# Altium PCB PCB1.PcbDoc
Units mm, origin at the board's own origin, x right, y up, seen from the top; angles counter-clockwise.
Board outline 152.4 x 101.6 mm, 2 copper layers (Top Layer, Bottom Layer), stack 1.571 mm thick; 45 components, 24 nets, 164 pads, 6 vias.
Unrouted connection lines stored in the file: 43.
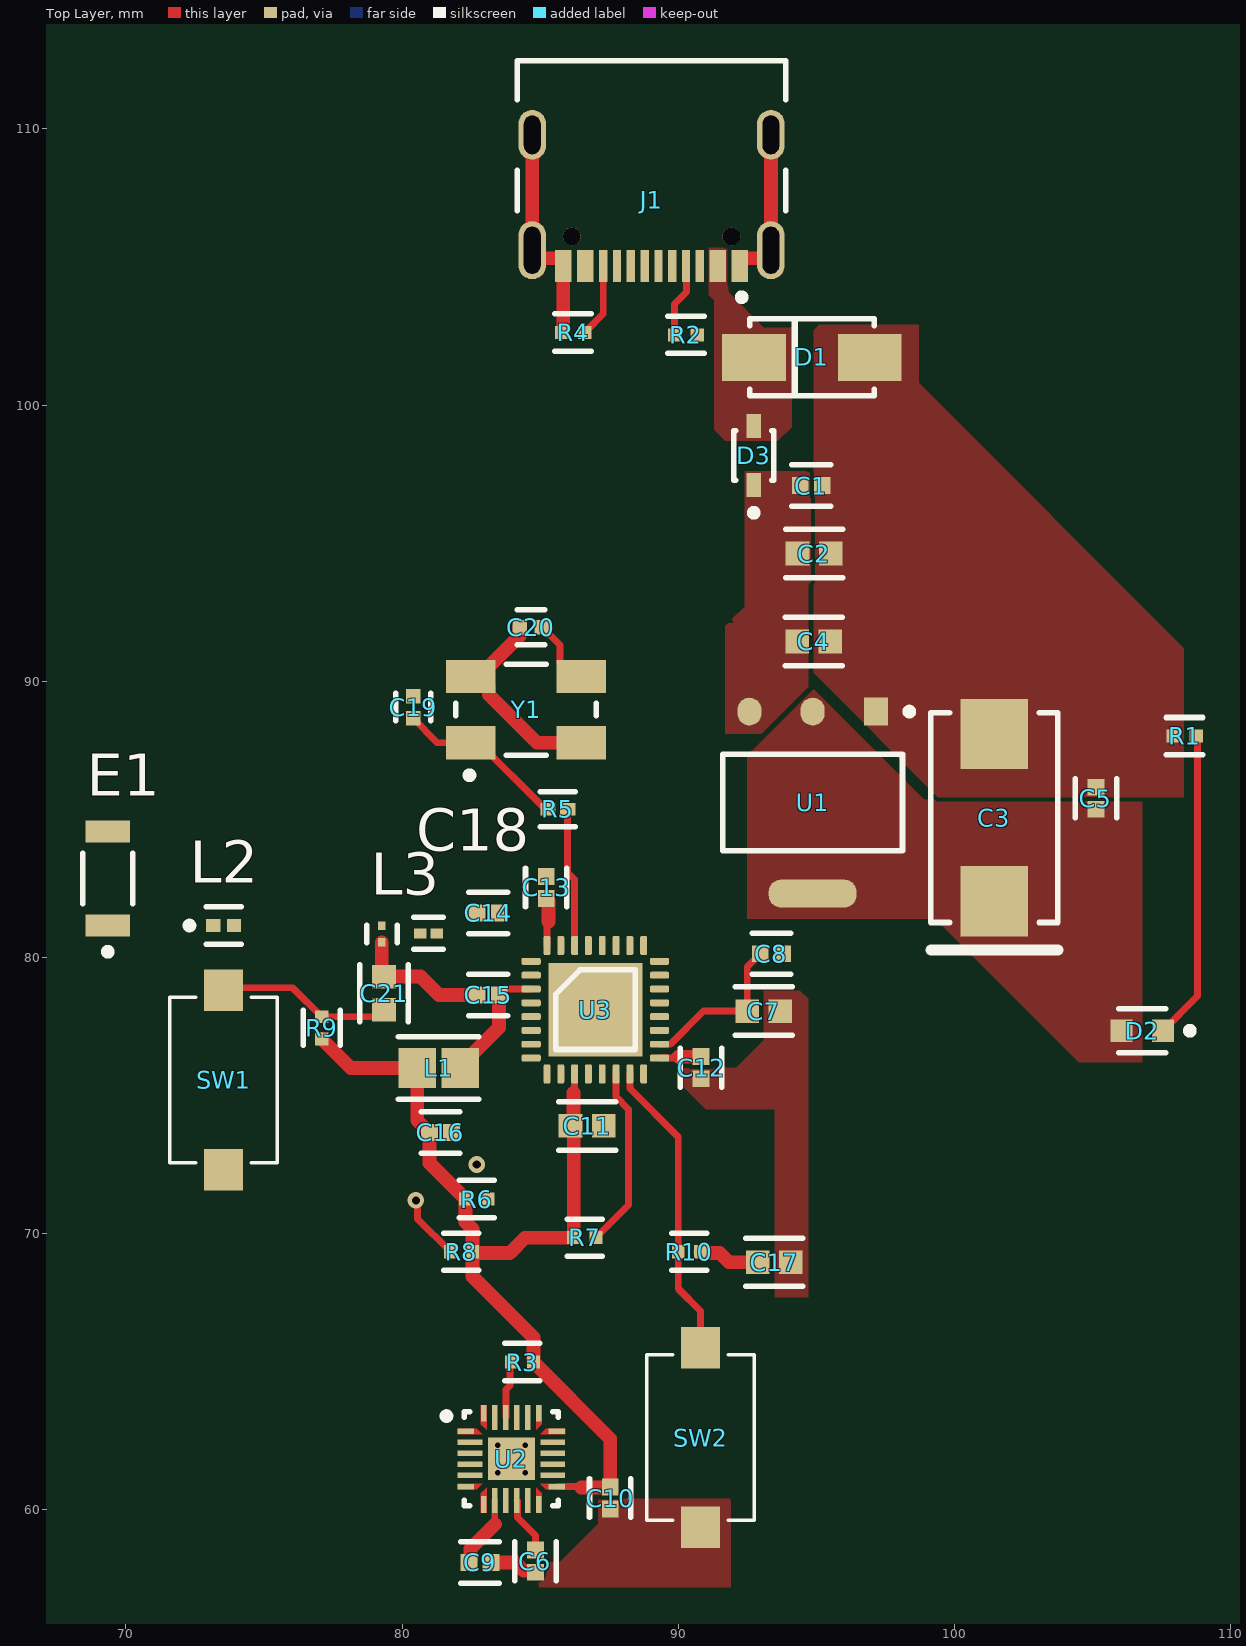
[diagram p0: Top Layer view]
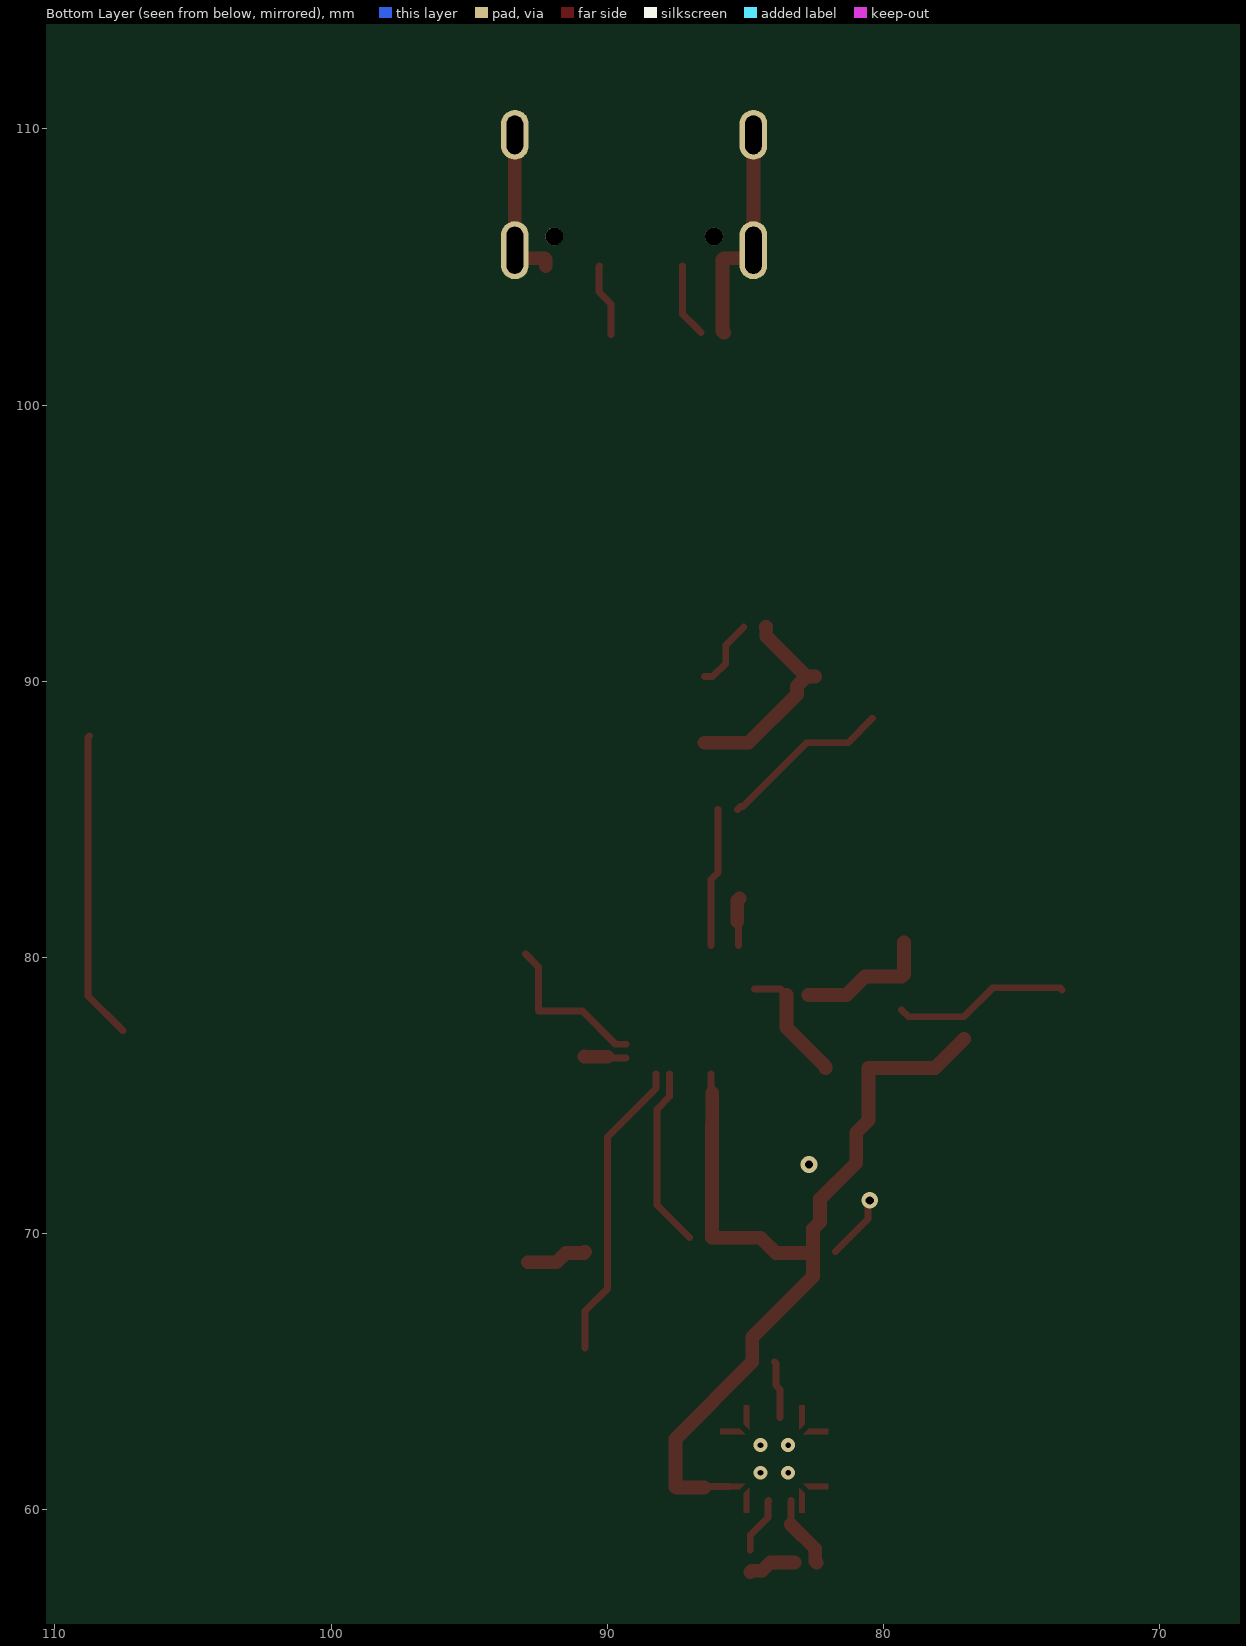
[diagram p1: Bottom Layer view, seen from below]

## Layer stack, top to bottom
Top Solder: solder mask 0.0102, Solder Resist, Dk 3.5
Top Layer: signal copper 0.0356
Dielectric 1: core 1.5, Core-025, Dk 4.6
Bottom Layer: signal copper 0.0356
Bottom Solder: solder mask 0.0102, Solder Resist, Dk 3.5

## Board outline
25.4,25.4 177.8,25.4 177.8,127 25.4,127

## Design rules (kind name [scope] priority, off if disabled: settings)
Clearance [All] p1: gap=0.152 ignorepadtopadclearanceinfootprint=FALSE
DiffPairsRouting [All] p1: maxlimit=0.254 minlimit=0.254 mostfreqgap=0.254 toplayer_minwidth=0.381 toplayer_maxwidth=0.381 toplayer_prefwidth=0.381 bottomlayer_minwidth=0.381 bottomlayer_maxwidth=0.381 bottomlayer_prefwidth=0.381 maxuncoupledlength=12.7
PolygonConnect [All] p1: connectstyle=Direct reliefconductorwidth=0.254 reliefentries=4 polygonreliefangle="90 Angle" airgapwidth=0.254
RoutingVias [All] p1: holewidth=0.3 width=0.6 viastyle="Through Hole" minholewidth=0.61 minwidth=1.27 maxholewidth=0.711 maxwidth=1.27
SilkToSolderMaskClearance [IsPad] p1: minsilkscreentomaskgap=0.102 clearancetoexposedcopper=TRUE
SolderMaskExpansion [All] p1: expansion=0.102 istentingtop=FALSE
SupplyNets "Schematic Supply Nets_4" [InNet('VBUS')] p1: voltage=0.000
SupplyNets "Schematic Supply Nets_3" [InNet('VSUS')] p2: voltage=0.000
SupplyNets "Schematic Supply Nets_2" [InNet('+3.3 RF')] p3: voltage=0.000
SupplyNets "Schematic Supply Nets_1" [InNet('+3.3V')] p4: voltage=0.000
SupplyNets "Schematic Supply Nets" [InNet('GND')] p5: voltage=0.000
Width [All] p1: maxlimit=0.762 minlimit=0.152 preferedwidth=0.254 minimp=50.000000 maximp=50.000000 favimp=50.000000
28 further rules are at their usual default settings.

## Classes and differential pairs
differential pair DIFF_P: +DIFF_P_P -DIFF_P_N

## Components (designator, comment, footprint, x,y, rotation, side; value= is the part's Value field where it differs from the comment)
C1 "100n" FP-0402B104K500CT-IPC_C 94.814,97.084 r180 top
C2 "10u" FP-GRM188-0_15-IPC_C 94.918,94.621 r180 top
C3 "22u" VISH-7343-31_N 101.444,85.063 r90 top
C4 "10u" FP-GRM188-0_15-IPC_C 94.903,91.44 r0 top
C5 "100n" FP-0402B104K500CT-IPC_C 105.123,85.765 r90 top
C6 "100n" FP-0402B104K500CT-IPC_C 84.828,58.14 r270 top
C7 "10u" FP-GRM188-0_15-IPC_C 93.095,78.053 r0 top
C8 "100n" FP-0402B104K500CT-IPC_C 93.372,80.132 r0 top
C9 "100n" FP-0402B104K500CT-IPC_C 82.821,58.09 r0 top
C10 "100n" FP-0402B104K500CT-IPC_C 87.534,60.425 r270 top
C11 "10u" FP-GRM188-0_15-IPC_C 86.699,73.9 r0 top
C12 "100n" FP-0402B104K500CT-IPC_C 90.825,76.008 r270 top
C13 "100n" FP-0402B104K500CT-IPC_C 85.217,82.531 r90 top
C14 "100n" FP-0402B104K500CT-IPC_C 83.112,81.607 r180 top
C15 "100n" FP-0402B104K500CT-IPC_C 83.112,78.638 r180 top
C16 "100n" FP-0402B104K500CT-IPC_C 81.388,73.66 r0 top
C17 "10u" FP-GRM188-0_15-IPC_C 93.472,68.961 r0 top
C18 "1p" FP-GRT033-0_03-IPC_B 80.957,80.868 r180 top
C19 "10p" FP-C0402-BB-MFG 80.398,89.06 r90 top value="10 pF"
C20 "10p" FP-C0402-BB-MFG 84.66,91.959 r180 top value="10 pF"
C21 "10u" FP-GRM188-0_15-IPC_C 79.346,78.703 r90 top
D1 "TVS diode" WE-TVSP_DO-214AC_Unidirectional 94.84,101.727 r0 top
D2 "LG Q396-PS-35" FP-LG_Q396-MFG 106.795,77.343 r180 top
D3 "3A" FP-BAT60JFILM-MFG 92.732,98.173 r90 top
E1 "2450AT18A100E" JT-2450AT18A100-2_V 69.342,82.853 r90 top
J1 "USB4105-GF-A" FP-USB4105-GF-A-MFG 89.031,108.619 r180 top
L1 "2.2u" FP-MLZ2012-0_85-IPC_B 81.321,75.992 r180 top
L2 "3n9" FP-LQG15HH_02-IPC_C 73.535,81.153 r0 top
L3 "2n7" FP-LQP03HQ_02-MFG 79.265,80.847 r90 top
R1 "5k1" FP-RN73R1E-IPC_C 108.331,88.011 r0 top
R2 "5k1" FP-RN73R1E-IPC_C 90.278,102.543 r0 top
R3 "10k" FP-MCS0402-IPC_C 84.354,65.345 r0 top
R4 "5k1" FP-RN73R1E-IPC_C 86.192,102.625 r180 top
R5 "22R" FP-AF0201-IPC_A 85.638,85.36 r180 top
R6 "10k" FP-MCS0402-IPC_C 82.7,71.247 r180 top
R7 "10k" FP-MCS0402-IPC_C 86.614,69.85 r180 top
R8 "10k" FP-MCS0402-IPC_C 82.146,69.342 r0 top
R9 "10k" FP-MCS0402-IPC_C 77.089,77.447 r270 top
R10 "10k" FP-MCS0402-IPC_C 90.401,69.342 r0 top
SW1 "434121025816" 434121025816 73.533,75.565 r270 top
SW2 "434121025816" 434121025816 90.805,62.611 r270 top
U1 "AMS1117-3.3" FP-AMS1117-IPC_C 94.865,85.605 r270 top
U2 "MPU-6500" INSE-MPU-6500-QFN24_M 83.955,61.841 r0 top
U3 "ESP32-C3" "ESP32-C3 - duplicate2" 86.995,78.105 r0 top
Y1 "40MHZ" FP-ABM3B-MFG 84.487,88.97 r0 top

## Footprints (in the part's own frame and the unit in brackets; to place one, negate y for a bottom-side part, rotate by r counter-clockwise, add the part's x,y. Pads: shape width x height; smd on the part's side, far side on the other; paste and mask are expansions set on the pad)
434121025816 [mm] "SMD Tact Switch, body 6x3.8mm"
  rect 1.5x1.4 smd: 1(-3.25,0) 2(3.25,0)
  silkscreen extent -3,-1.95 3,1.95, body extent -3.65,-1.95 3.65,1.95, height 2.5
"ESP32-C3 - duplicate2" [mm]
  rrect50% 0.7x0.25 smd paste-0.051 mask+0.051: 1(-2.325,1.75) 2(-2.325,1.25) 3(-2.325,0.75) 4(-2.325,0.25) 5(-2.325,-0.25) 6(-2.325,-0.75) 7(-2.325,-1.25) 8(-2.325,-1.75) 17(2.325,-1.75) 18(2.325,-1.25) 19(2.325,-0.75) 20(2.325,-0.25) 21(2.325,0.25) 22(2.325,0.75) 23(2.325,1.25) 24(2.325,1.75)
  rrect50% 0.25x0.7 smd paste-0.051 mask+0.051: 9(-1.75,-2.325) 10(-1.25,-2.325) 11(-0.75,-2.325) 12(-0.25,-2.325) 13(0.25,-2.325) 14(0.75,-2.325) 15(1.25,-2.325) 16(1.75,-2.325) 25(1.75,2.325) 26(1.25,2.325) 27(0.75,2.325) 28(0.25,2.325) 29(-0.25,2.325) 30(-0.75,2.325) 31(-1.25,2.325) 32(-1.75,2.325)
  rect 3.4x3.4 smd mask+0: 33(0,0)
  silkscreen extent -1.44,-1.44 1.44,1.44, body extent -2.5,-2.5 2.5,2.5, height 1.12
FP-0402B104K500CT-IPC_C [mm]
  rect 0.606x0.606 smd paste+0 mask+0: 1(-0.4,0) 2(0.4,0)
  silkscreen extent -0.7,-0.75 0.7,0.75, body extent -0.8,-0.45 0.8,0.45, height 0.25
FP-ABM3B-MFG [mm]
  rect 1.8x1.2 smd paste+0 mask+0: 1(-2,-1.2) 2(2,-1.2) 3(2,1.2) 4(-2,1.2)
  silkscreen extent -2.55,-2.5 2.55,1.65, body extent -3,-1.9 3,1.9, height 0.25
FP-AF0201-IPC_A [mm]
  rect 0.554x0.463 smd paste+0 mask+0: 1(-0.354,0) 2(0.354,0)
  silkscreen extent -0.63,-0.63 0.63,0.63, body extent -0.83,-0.43 0.83,0.43, height 0.25
FP-AMS1117-IPC_C [mm]
  rect 1.004x0.872 smd paste+0 mask+0: 1(-3.295,2.29)
  rrect100% 1.004x0.872 smd paste+0 mask+0: 2(-3.295,0) 3(-3.295,-2.29)
  rrect87% 1.004x3.182 smd paste+0 mask+0: 4(3.295,0)
  silkscreen extent -3.42,-3.25 1.75,3.63, body extent -3.9,-3.35 3.9,3.35, height 0.25
FP-BAT60JFILM-MFG [mm]
  rect 0.86x0.54 smd paste+0 mask+0: 1(-1.07,0) 2(1.07,0)
  silkscreen extent -2.2,-0.72 0.9,0.72, body extent -1.6,-0.82 1.6,0.82, height 0.25
FP-C0402-BB-MFG [mm]
  rect 0.52x0.52 smd paste+0 mask+0: 1(-0.4,0) 2(0.4,0)
  silkscreen extent -0.5,-0.64 0.5,0.64, body extent -0.8,-0.4 0.8,0.4, height 0.25
FP-GRM188-0_15-IPC_C [mm]
  rect 0.856x0.858 smd paste+0 mask+0: 1(-0.601,0) 2(0.601,0)
  silkscreen extent -1.03,-0.87 1.03,0.87
FP-GRT033-0_03-IPC_B [mm]
  rect 0.454x0.363 smd paste+0 mask+0: 1(-0.304,0) 2(0.304,0)
  silkscreen extent -0.53,-0.58 0.53,0.58, body extent -0.68,-0.33 0.68,0.33, height 0.25
FP-LG_Q396-MFG [mm]
  rect 0.8x0.8 smd paste+0 mask+0: 1(-0.75,0) 2(0.75,0)
  silkscreen extent -1.85,-0.8 0.85,0.8, body extent -1.25,-0.55 1.25,0.55, height 0.25
FP-LQG15HH_02-IPC_C [mm]
  rect 0.515x0.472 smd paste+0 mask+0: 1(-0.379,0) 2(0.379,0)
  silkscreen extent -1.36,-0.67 0.64,0.67, body extent -0.74,-0.38 0.74,0.38, height 0.25
FP-LQP03HQ_02-MFG [mm]
  rect 0.3x0.275 smd paste+0 mask+0: 1(-0.3,0) 2(0.3,0)
  silkscreen extent -0.32,-0.56 0.32,0.55, body extent -0.55,-0.27 0.55,0.26, height 0.25
FP-MCS0402-IPC_C [mm]
  rect 0.465x0.472 smd paste+0 mask+0: 1(-0.404,0) 2(0.404,0)
  silkscreen extent -0.64,-0.67 0.64,0.67, body extent -0.74,-0.38 0.74,0.38, height 0.25
FP-MLZ2012-0_85-IPC_B [mm]
  rect 1.354x1.456 smd paste+0 mask+0: 1(-0.776,0) 2(0.776,0)
  silkscreen extent -1.45,-1.13 1.45,1.13, body extent -1.7,-0.98 1.7,0.98, height 0.25
FP-RN73R1E-IPC_C [mm]
  rect 0.488x0.472 smd paste+0 mask+0: 1(-0.414,0) 2(0.414,0)
  silkscreen extent -0.66,-0.67 0.66,0.67, body extent -0.76,-0.38 0.76,0.38, height 0.25
FP-USB4105-GF-A-MFG [mm]
  rrect100% 1x2.1 hole 1.7 slot 0.6 at 0 deg paste-2539.97 mask+0: 1(-4.32,3.015) 2(4.32,3.015)
  rrect100% 1x1.8 hole 1.4 slot 0.6 at 0 deg paste-2539.97 mask+0: 3(-4.32,-1.165) 4(4.32,-1.165)
  rect 0.6x1.15 smd paste+0 mask+0: A1-B12(-3.2,3.59) A4-B9(-2.4,3.59) B1-A12(3.2,3.59) B4-A9(2.4,3.59)
  rect 0.3x1.15 smd paste+0 mask+0: A5(-1.25,3.59) A6(-0.25,3.59) A7(0.25,3.59) A8(1.25,3.59) B5(1.75,3.59) B6(0.75,3.59) B7(-0.75,3.59) B8(-1.75,3.59)
  round 0.65 hole 0.65 unplated paste-2539.97 mask+0: ""(-2.89,2.515) ""(2.89,2.515)
  silkscreen extent -4.86,-3.84 4.86,4.84, body extent -4.96,-3.94 4.96,4.27, height 0.25
INSE-MPU-6500-QFN24_M [mm] "QFN, 24-Leads, Body 3.1x3.1mm, Pitch 0.4mm, Thermal Pad 1.7X1.54mm, IPC Low Density"
  rect 0.6x0.2 smd: 1(-1.65,1) 6(-1.65,-1) 13(1.65,-1) 18(1.65,1)
  rect 0.9x0.2 smd: 2(-1.5,0.6) 3(-1.5,0.2) 4(-1.5,-0.2) 5(-1.5,-0.6) 14(1.5,-0.6) 15(1.5,-0.2) 16(1.5,0.2) 17(1.5,0.6)
  rect 0.2x0.6 smd: 7(-1,-1.65) 12(1,-1.65) 19(1,1.65) 24(-1,1.65)
  rect 0.2x0.9 smd: 8(-0.6,-1.5) 9(-0.2,-1.5) 10(0.2,-1.5) 11(0.6,-1.5) 20(0.6,1.5) 21(0.2,1.5) 22(-0.2,1.5) 23(-0.6,1.5)
  rect 1.7x1.54 smd: 25(0,0)
  Top Layer region: 1.95,-1.1 1.95,-0.9 1.05,-0.9 1.25,-1.1
  Top Layer region: 1.95,1.1 1.95,0.9 1.05,0.9 1.25,1.1
  Top Layer region: -1.1,1.95 -0.9,1.95 -0.9,1.05 -1.1,1.25
  Top Layer region: 1.1,-1.95 0.9,-1.95 0.9,-1.05 1.1,-1.25
  Top Layer region: -1.95,-1.1 -1.95,-0.9 -1.05,-0.9 -1.25,-1.1
  Top Layer region: 1.1,1.95 0.9,1.95 0.9,1.05 1.1,1.25
  Top Layer region: -1.1,-1.95 -0.9,-1.95 -0.9,-1.05 -1.1,-1.25
  Top Layer region: -1.95,1.1 -1.95,0.9 -1.05,0.9 -1.25,1.1
  silkscreen extent -2.47,-1.7 1.7,1.7, body extent -1.55,-1.55 1.55,1.55, height 0.95
JT-2450AT18A100-2_V [mm] "Chip Antenna, 2-Leads, Body 3.4x1.8mm"
  rect 0.8x1.6 smd: 1(-1.7,0) 2(1.7,0)
  silkscreen extent -2.77,-0.9 0.91,0.9, body extent -1.7,-0.9 1.7,0.9, height 1.4
VISH-7343-31_N [mm] "Molded Capacitor, 2-Leads, Body 7.6x4.6mm, IPC Medium Density"
  rect 2.55x2.45 smd: 1(-3.025,0) 2(3.025,0)
  silkscreen extent -4.8,-2.3 3.8,2.3, body extent -4.02,-2.3 4.02,2.3, height 3.1
WE-TVSP_DO-214AC_Unidirectional [mm] "Power TVS Diode, 2-Leads. body 4.24x2.67mm"
  rect 2.3x1.7 smd: 1(-2.1,0) 2(2.1,0)
  silkscreen extent -2.25,-1.4 2.25,1.4, body extent -2.56,-1.33 2.56,1.34, height 2.24

## Part data
C1 C5 C6 C8 C9 C10 C12 C13 C14 C15 C16: library part CMP-45632-000010-1, "CAP CER 0.1UF 50V X7R 0402", Capacitance=100nF, Case Code (Imperial)=0402, Case Code (Metric)=1005, Max Operating Temperature=125°C, Min Operating Temperature=-55°C, Tolerance=10%, Voltage Rating=50V, Case/Package=0402, Mount="Surface Mount", Packaging="Cut Tape", RoHS Compliant=Yes, Series=-
C2 C4 C7 C11 C17 C21: library part CMP-06035-017494-1, "Chip Multilayer Ceramic Capacitors for General Purpose, 0603, 10uF, X5R, 15%, 20%, 16V", Capacitance=10uF, Case Code (Imperial)=0603, Case Code (Metric)=1608, Max Operating Temperature=85°C, Min Operating Temperature=-55°C, Tolerance=20%, Voltage Rating=16V, Case/Package=0603, Height=0.8mm, Lead Free="Lead Free", Length=0.063inch, Material=Ceramic, Mount="Surface Mount", Packaging="Cut Tape", Thickness=0.037inch, Voltage Rating (DC)=16V, Width=0.031inch
C3: library part CMP-1666-00023-1, "Solid Tantalum Chip Capacitor, 22 uF, +/- 10%, 20 V, -55 to 125 degC, 2917 (7343 Metric), RoHS, Tape and Reel", Capacitance="47 uF", Case Code (Imperial)=1210, Case Code (Metric)=3225, Max Operating Temperature="125 degC", Min Operating Temperature="-55 degC", Package Quantity=1500, Tolerance=20%, Type (Capacitors)=X7R, Voltage Rating="6.3 V", Case\Package=1210, ComponentLink1Description="Manufacturer URL", ComponentLink1URL=http://www.vishay.com/, ComponentLink2Description=Datasheet, ComponentLink2URL=http://www.vishay.com/docs/40002/293d.pdf, DatasheetVersion=Aug-16, Height="2.5 mm", Length="3.2 mm", Mount="Surface Mount", PackageDescription="2-Pin Surface Mount Device, Body 7.3 x 4.3 mm", PackageReference=7343-31, Packaging="Tape and Reel", Pins=2, Radiation Hardening=No, REACH SVHC="No SVHC", RoHSCompliant=true, Voltage Rating (DC)="6.3 V", Width="2.5 mm"
C18: library part CMP-06035-000122-2, "Multi-Layer Ceramic Capacitor 1pF 50V C0G ±0.25pF 0201 Paper T/R"
C19 C20: library part CMP-03020-005426-2, "CAP CER 10PF 16V NP0 0402", Capacitance="10 pF", Manufacturer=Kemet, Manufacturer Part Number=C0402C100J4GAC7867, Package=C0402-BB, Temperature="-55°C to +125°C", Temperature Characteristic=C0G, Temperature Coefficient=15%, Temperature Range High=+125°C, Temperature Range Low=-55°C, Tolerance=0.05, Voltage Rating="16 V", Automotive=No, Category=Cap, ComponentLink2Description=Datasheet, ComponentLink2URL=https://content.kemet.com/datasheets/KEM_C1002_X7R_SMD.pdf, Device Class L1="Passive Components", Device Class L2=Capacitors, Device Class L3="Ceramic Capacitors", Digikey Description="CAP CER 10PF 16V NP0 0402", Height=0.55mm, Ipc Land Pattern Name=CAPC10050X50, Lead Free=Yes, Material=Ceramic, Octopart=https://octopart.com/c0402c100j4gac7867-kemet-1500972, RoHS=TRUE
D1: library part CMP-03913-71101541-2, "TVS diode [Würth Elektronik] 824500851 TVS diode", Breakdown Voltage=99.2V, Clamping Voltage=137V, Leakage Current=1µA, Max Operating Temperature=150°C, Min Operating Temperature=-65°C, Peak Pulse Current=2.9A, Peak Pulse Power=400W, Power Line Protection=No, Reverse Standoff Voltage=85V, Composition=Zener, Height=2.25mm, Length=4.24mm, Max Breakdown Voltage=99.2V, Min Breakdown Voltage=99.2V, Mount="Surface Mount", Number of Pins=2, Number of Unidirectional Channels=1, Packaging="Cut Tape", Polarity=Unidirectional, REACH SVHC=Unknown, RoHS=Compliant, Width=2.67mm
D2: library part CMP-62016-000069-1, "LED GREEN DIFFUSED 0603 SMD", Case Code (Imperial)=0603, Case Code (Metric)=1608, Color=Green, Forward Current=20mA, Forward Voltage=2V, Lens Color=White, Case/Package=0603, Dominant Wavelength=573nm, Height=0.4mm, Length=1.6mm, Lens Size=0.8mm, Lens Style=Flat, Lens Transparency=Diffused, Luminous Intensity=163mcd, Mount="Surface Mount", Packaging="Tape and Reel", REACH SVHC="No SVHC", RoHS Compliant=Yes, Test Current=20mA, Viewing Angle=120°, Wavelength=573nm, Width=0.8mm
D3: library part CMP-12187-000028-1, "DIODE SCHOTTKY 10V 3A SOD323", Forward Voltage=580mV, Max Forward Surge Current (Ifsm)=5A, Max Operating Temperature=150°C, Max Repetitive Reverse Voltage (Vrrm)=10V, Max Reverse Leakage Current=7.5uA, Min Operating Temperature=-65°C, Package Quantity=1, Average Rectified Current=3A, Contact Plating=Tin, Current Rating=3A, Element Configuration=Single, Forward Current=3A, Height=1.07mm, Lead Free="Lead Free", Length=1.8mm, Max Reverse Voltage (DC)=10V, Max Surge Current=5A, Mount="Surface Mount", Number of Pins=2, Output Current=3A, Packaging="Tape and Reel", Peak Non-Repetitive Surge Current=5A, Peak Reverse Current=7.5uA, Polarity=Standard, Radiation Hardening=No, REACH SVHC="No SVHC", Voltage Rating (DC)=10V, Weight=0.01lb, Width=1.45mm
E1: library part CMP-2000-05167-1, "Ceramic Antenna, 2.45 GHZ, 2 W, -40 to 125 degC, 2-Pin SMD, RoHS, Tape and Reel", Manufacturer="Johanson Technology", Maximum Frequency=2500MHz, Minimum Frequency=2400MHz, Package=2Case18-4, Category=Antenna, Datasheet URL=http://www.johansontechnology.com/datasheets/antennas/2450AT18A100.pdf, Datasheet Version="Rev. 1.3, 07/2014", Manufacturer URL=https://www.johansontechnology.com/, Type=Ceramic, Typical Antenna Gain=0.5dB
J1: library part CMP-245163-000001-1, "CONN RCPT USB2.0 TYPEC 5A", Current Rating=5/6.25/1.25/0.25A, Manufacturer=GCT, Package=0, Temperature="-40°C to +85°C", Temperature Range High=+85°C, Temperature Range Low=-40°C, Voltage Rating=20V, Automotive=No, Category=Conn, ComponentLink2Description=Datasheet, ComponentLink2URL=https://gct.co/files/drawings/usb4105.pdf, Conn Orientation="Right Angle", Contact Material=Gold,Nickel, Device Class L1=Connectors, Device Class L2="USB Connectors", Device Class L3=unset, Digikey Description="CONN RCPT USB2.0 TYPEC 5A", Height=3.46mm, Is Female=yes, Lead Free=Yes, Manufacturer Part Number=USB4105-GF-A, Number Of Contacts=16, Octopart=https://octopart.com/usb4105-gf-a-gct-106627878, RoHS=TRUE, Usb Standard="USB 2.0"
L1: library part CMP-08253-000223-1, "Shielded Multilayer Inductor 2.2uH ±20% 800mA 156mΩ AEC-Q200 SMD 0805", Case Code (Imperial)=0805, Case Code (Metric)=2012, Current Rating=800mA, DC Resistance (DCR)=156mR, Inductance=2.2uH, Max Operating Temperature=125°C, Min Operating Temperature=-55°C, Package Quantity=1, Ratings=AEC-Q200, Resistance=0.156R, Saturation Current=170mA, Test Frequency=2MHz, Tolerance=20%, Case/Package=0805, Core Material=Ferrite, Height=0.85mm, Height - Seated (Max)=0.041inch, Length=0.079inch, Max DC Current=800mA, Mount="Surface Mount", Packaging="Tape and Reel", RoHS Compliant=Yes, Shielding=Shielded, Termination=SMD/SMT, Weight=0.000194oz, Width=1.25mm
L2: library part CMP-06042-010120-1, "Multilayer type Inductor for Automotive 39nH ±3% 0.65Ω 300mA 0402", Case Code (Imperial)=0402, Case Code (Metric)=1005, Continuous Drain Current (ID)=24A, Current Rating=300mA, DC Resistance (DCR)=650mR, Drain to Source Voltage (Vdss)=250V, Inductance=39nH, Input Capacitance=2.41nF, Max Operating Temperature=125°C, Max Power Dissipation=150W, Min Operating Temperature=-55°C, Ratings=AEC-Q200, Self Resonant Frequency=1.2GHz, Test Frequency=100MHz, Tolerance=3%, Case/Package=0402, Core Material=Air, Mount="Surface Mount", Number of Pins=8, Packaging="Tape and Reel", Rds On Max=67mR, Shielding=Unshielded
L3: library part CMP-06042-000905-1, "Film type RF Inductor 27nH ±3% 170mA 1.6Ω 0201 (0603)"
R1 R2 R4: library part CMP-04015-008529-1, "5.1kΩ ±1% 0.063W, 1/16W Chip Resistor 0402 (1005 Metric) Moisture Resistant Thin Film"
R3 R6 R7 R8 R9 R10: library part CMP-2002-02447-2, "RES SMD 1.2K OHM 1% 1/10W 0402", Case/Package=0402, Max Operating Temperature=125°C, Max Power Dissipation=63mW, Min Operating Temperature=-55°C, Package Quantity=10000, Resistance=10kR, Temperature Coefficient=25ppm/°C, Tolerance=0.1%, Composition="Thin Film", Contact Plating=Tin, Depth=0.5mm, Height=0.015inch, Lead Free="Lead Free", Length=0.039inch, Military Standard=Not, Number of Terminations=2, Packaging="Tape and Reel", Width=0.02inch
R5: library part CMP-03412-043910-1, "Anti-Sulfurated Chip Resistors Automotive Grade 22Ω 5% 200ppm/°C 0201", Case Code (Imperial)=0201, Case Code (Metric)=0603, Max Operating Temperature=125°C, Max Power Dissipation=50mW, Min Operating Temperature=-55°C, Package Quantity=10000, Resistor Type="Thick Film", Temperature Coefficient=200ppm/°C, Tolerance=5%, Voltage Rating=25V, Case/Package=0201, Features="Moisture Resistant", Height=0.23mm, Lead Free="Lead Free", Length=0.6mm, Number of Terminations=2, Packaging="Tape and Reel", Power Rating=50mW, Resistance=22R, RoHS Compliant=Yes, Series=AF, Termination=SMD/SMT, Weight=6E-06oz, Width=0.3mm
SW1 SW2: library part CMP-1459-00004-5, "Switch Tactile Spst-no 0.05A 12V", Color=Black, Contact Current Rating=50mA, Contact Resistance=100mΩ, Insulation Resistance=100MΩ, Max Operating Temperature=85°C, Min Operating Temperature=-40°C, Operating Force=1.56N, Voltage Rating=12V, Actuator Length=800µm, Actuator Material="Liquid Crystal Polymer, Polymer", Contact Material="Stainless Steel, Steel", Contact Plating=Silver, Current Rating=50mA, Height=2.5mm, Illumination Type="Illuminated, Non-Illuminated", Lead Free="Lead Free", Length=7.3mm, Mechanical Life=50kcycles, Mount="Surface Mount", Packaging="Tape and Reel", REACH SVHC=No, RoHS=Compliant, Switch Function=Off-Mom, Switch Travel=250µm, Termination=SMD/SMT, Throw Configuration=SPST
U1: library part CMP-209535-000001-1, "LDO Voltage Regulators 1A, 3.3V", Dropout Voltage=1.1V, Manufacturer="Advanced Monolithic Systems", Max Junction Temp=+125°C, Max Power Dissipation=1.2W, Max Supply Voltage=15V, Nominal Supply Current=5mA, Output Current=1A, Output Voltage=3.3V, Package=AMS1117, Temperature="-40°C to +125°C", Temperature Range Low=-40°C, Automotive=No, Category=IC, ComponentLink2Description=Datasheet, ComponentLink2URL=http://www.advanced-monolithic.com/pdf/ds1117.pdf, Device Class L1="Integrated Circuits (ICs)", Device Class L2="Power Management ICs", Device Class L3="Voltage Regulators - Linear", Height=1.8mm, Ipc Land Pattern Name=SOT229P700X180-4, Lead Free=Yes, Manufacturer Part Number=AMS1117-3.3, Number Of Outputs=1, Octopart=https://octopart.com/ams1117-3.3-advanced+monolithic+systems-25899300, Output Type=Fixed, RoHS=TRUE, Standoff Height=0.64mm, Temperature Range High=+125°C
U2: library part CMP-2000-05154-1, "3-Axis Gyroscope and 3-Axis Accelerometer Motion Processing Unit with I2C and SPI, 1.71 to 3.45 V, -40 to 85 degC, 24-Pin QFN, RoHS, Tape and Reel", Manufacturer=InvenSense, Standard Package=1, Article Library=MCUsasSensorHubs, Category=Sensors,Transducers, Datasheet URL=https://datasheet.ciiva.com/29175/mpu-6500-spec-29175093.pdf, Datasheet Version="Rev. 1.0, 09/2013", Dynamic Catalog=MPU-6500Series, Family=Multifunction, Featured Product=InvenSense-MPU-6500Six-Axis(Gyro+Acceleromete)MEMSMotionTrackingDevices, Manufacturer URL=http://www.invensense.com/, Online Catalog=MPU-6500Series, Other Names=1428-1011-6, Output Type=Digital, Sensor Type=GyroscopeandAccelerometer, Series=-
U3: "RISC-V MCU with Wi-Fi and BLE", Manufacturer="Espressif Systems"
Y1: library part CMP-27762-009597-1, "Crystal 19.44MHz ±10ppm 10pF SMD-4 5mm x 3.2mm", Capacitance=0F, Case/Package=SMD/SMT, ESR (Equivalent Series Resistance)=50R, Frequency=19.44MHz, Frequency Stability=10ppm, Load Capacitance=10pF, Max Operating Temperature=60°C, Min Operating Temperature=-10°C, Operating Frequency="19.44 MHz", Package Quantity=1000, Resistor Type=Ceramic, Frequency Tolerance=10ppm, Height=0.043inch, Lead Free="Lead Free", Length=0.197inch, Mount="Surface Mount", Packaging="Tape and Reel", RoHS Compliant=Yes, Series=ABM3B, Termination=SMD/SMT, Tolerance=10ppm, Width=3.2mm

## Via types
v1: diameter 0.5, hole 0.2, Top Layer to Bottom Layer, 4 vias
v2: diameter 0.6, hole 0.3, Top Layer to Bottom Layer, 2 vias

## Nets (pads, with @x,y where several pads share a name; then routed paths per layer and width w, separated by ;. In a path a pad name is that pad's centre, name@x,y a point inside that pad or via, vN(x,y) a via of type N, cw(c..) or ccw(c..) an arc to the next point about the centre after c; other vN are vias at no path point)
"+3.3 RF": C15.1 L1.1 U3.2 U3.3 | length 4.5
  Top Layer w0.25: C15.1 83.729,78.855 U3.3
  Top Layer w0.5: L1.1 82.097,76.043 83.512,77.458 C15.1
+3.3V: C3.1 C5.1 C9.1 C10.1 C11.1 C12.1 C13.1 C14.1 C16.1 C17.1 D2.2 L1.2 R3.2 R6.2 R7.2 R8.2 R9.2 R10.2 U1.2 U1.4 U2.8 U2.13 U3.11 U3.17 U3.31 U3.32 | length 41.9
  Top Layer w0.25: U2.8 83.355,59.571 83.363,59.563 83.363,59.476 ; U3.32 85.245,81.245 85.3,81.3 ; U2.13 86.459,60.841 86.5,60.8 ; 86.2,75.1 86.245,75.145 U3.11 ; U3.17 89.955,76.355 90,76.4
  Top Layer w0.5: R9.2 78.141,75.992 L1.2 80.546,74.102 C16.1 80.988,72.555 R6.2 82.296,70.421 82.55,70.168 R8.2 ; C9.1 82.474,58.143 82.474,58.587 83.363,59.476 ; C13.1 85.27,82.078 85.3,82.048 85.3,81.3 ; 86.2,75.1 86.2,74.002 86.21,73.992 R7.2 84.45,69.85 83.9,69.3 82.592,69.3 R8.2 ; 86.5,60.8 87.509,60.8 C10.1 87.534,62.568 R3.2 84.757,66.24 82.55,68.447 R8.2 ; 90,76.4 90.817,76.4 C12.1 ; R10.2 90.847,69.3 91.5,69.3 91.839,68.961 C17.1
BOOT: R10.1 SW2.1 U3.15 | length 11
  Top Layer w0.25: U3.15 88.245,75.255 89.998,73.502 R10.1 89.998,68.002 90.805,67.195 SW2.1
CHIP_EN: C21.1 R9.1 SW1.1 U3.7 | length 6.4
  Top Layer w0.25: SW1.1 73.618,78.9 76.036,78.9 77.085,77.851 R9.1 79.094,77.851 C21.1
DIFF_P_N: J1.A7 J1.B7 U3.25
DIFF_P_P: J1.A6 J1.B6 U3.26
GND: C1.1 C2.1 C3.2 C4.2 C5.2 C6.2 C7.2 C8.2 C9.2 C10.2 C11.2 C12.2 C13.2 C14.2 C15.2 C16.2 C17.2 C19.2 C20.2 C21.2 D1.2 J1.1 J1.2 J1.3 J1.4 J1.A1-B12 J1.B1-A12 L3.1 R1.1 R2.2 R4.2 SW1.2 SW2.2 U1.1 U2.9 U2.11 U2.18 U2.25 U3.33 Y1.2 Y1.4 | length 28
  Top Layer w0.5: L3.1 79.265,79.385 C21.2 80.67,79.304 81.336,78.638 C15.2 ; Y1.4 Y1.4@82.787,90.17 ; C9.2 84.103,58.09 84.4,57.793 84.775,57.793 C6.2 ; C20.2 84.25,91.949 84.25,91.633 Y1.4@82.787,90.17 ; J1.2@84.711,105.547 84.942,105.317 85.781,105.317 85.831,105.267 J1.B1-A12 85.831,102.678 R4.2 ; J1.2 J1.4 ; Y1.2 84.887,87.77 83.137,89.52 83.137,89.82 Y1.4@82.787,90.17 ; J1.A1-B12 92.231,105.267 92.281,105.317 93.12,105.317 93.351,105.547 J1.1 J1.3
  other v1: 83.455,61.341 84.455,61.341 83.455,62.341 84.455,62.341
GPIO8: R7.1 U3.14 U3.16 | length 6.6
  Top Layer w0.25: R7.1 87.018,69.854 88.2,71.036 88.2,74.5 87.745,74.955 U3.14
NetC6_1: C6.1 U2.10 | length 2.1
  Top Layer w0.25: U2.10 84.178,60.318 84.178,59.722 84.828,59.072 C6.1
NetC7_1: C7.1 C8.1 U3.18 | length 5.9
  Top Layer w0.25: U3.18 89.709,76.855 90.907,78.053 C7.1 92.494,79.655 C8.1
NetC18_1: C18.1 U3.1
NetC18_2: C18.2 L2.2 L3.2
NetC19_1: C19.1 R5.2 Y1.1 | length 6.3
  Top Layer w0.25: C19.1 81.288,87.77 Y1.1 82.787,87.77 85.091,85.466 85.177,85.466 R5.2
NetD2_1: D2.1 R1.2 | length 11.2
  Top Layer w0.25: D2.1 108.8,78.598 108.8,87.956 R1.2
NetE1_1: E1.1 L2.1
NetJ1_A5: J1.A5 R2.1 | length 2.7
  Top Layer w0.25: R2.1 89.864,103.664 90.3,104.1 90.3,105.01 J1.A5
NetJ1_B5: J1.B5 R4.1 | length 2.7
  Top Layer w0.25: R4.1 86.614,102.625 86.725,102.736 86.725,102.744 87.281,103.3 J1.B5
NetR3_1: R3.1 U2.22 | length 2.1
  Top Layer w0.25: U2.22 83.755,64.355 83.9,64.5 83.9,65.295 R3.1
SCL: R6.1 U2.23 U3.8
SDA: R8.1 U2.24 U3.6 | length 2.4
  Top Layer w0.25: v2(80.5,71.2) 80.563,71.137 80.563,70.525 81.743,69.346 R8.1
VBUS: D1.1 D3.2 J1.A4-B9 J1.B4-A9
VSUS: C1.2 C2.2 C4.1 D3.1 U1.3
XTAL_N: C20.1 U3.29 Y1.3 | length 2.6
  Top Layer w0.25: C20.1 85.712,91.307 85.712,90.645 86.187,90.17 Y1.3
XTAL_P: R5.1 U3.30 | length 5
  Top Layer w0.25: R5.1 85.992,83.081 86.245,82.828 U3.30
pads on no net: E1.2 J1. J1.A8 J1.B8 U2.1 U2.2 U2.3 U2.4 U2.5 U2.6 U2.7 U2.12 U2.14 U2.15 U2.16 U2.17 U2.19 U2.20 U2.21 U3.4 U3.5 U3.9 U3.10 U3.12 U3.13 U3.19 U3.20 U3.21 U3.22 U3.23 U3.24 U3.27 U3.28
copper on no net:
  other v2: 82.7,72.5

## Polygon pours and split planes (outlines as drawn)
GND on Top Layer "GND_L01_P018" (solid, pour order 18): 93.5,67.7 93.5,74.5 91,74.5 90.2,75.3 90.2,76 92.1,76 93.1,77 93.1,78.8 94.4,78.8 94.7,78.5 94.7,67.7
GND on Top Layer "GND_L01_P017" (solid, pour order 17): 92,60.4 91.9,60.3 91.9,57.2 83.1,57.2 82.8,57.5 82.8,58.5 84.2,58.5 84.5,58.2 84.5,58.1 85.7,58.1 87.1,59.5 87.1,60.4
+3.3V on Top Layer "+3.3V_L01_P014" (solid, pour order 14): 106.8,76.2 106.8,85.7 98.9,85.7 94.9,89.7 92.5,87.3 92.5,81.4 99.3,81.4 104.5,76.2 106.7,76.2
VSUS on Top Layer "VSUS_L01_P013" (solid, pour order 13): 92.4,93.9 92.4,92.7 91.8,92.1 94.7,92.1 94.7,93.5 94.8,93.6 94.8,93.9
VSUS on Top Layer "VSUS_L01_P010" (solid, pour order 10): 92.4,93.9 92.4,92.7 91.8,92.1 94.7,92.1 94.7,93.5 94.8,93.6 92.7,93.6
VSUS on Top Layer "VSUS_L01_P009" (solid, pour order 9): 94.7,92.1 94.7,89.8 93,88.1 91.7,88.1 91.7,92 91.8,92.1
GND on Top Layer "GND_L01_P008" (solid, pour order 8): 94.9,90.3 99.4,85.8 108.3,85.8 108.3,91.2 98.7,100.8 98.7,102.9 95.1,102.9 94.9,102.7
VSUS on Top Layer "VSUS_L01_P006" (solid, pour order 6): 92.4,97.6 94.8,97.6 94.8,93.6 92.7,93.6 92.4,93.9 92.4,94.1
VBUS on Top Layer "VBUS_L01_P001" (solid, pour order 1): 91.1,105.7 91.8,105.7 91.8,104.1 93.1,102.8 94.1,102.8 94.1,99.2 93.6,98.7 91.7,98.7 91.3,99.1 91.3,103.8 91.1,104